# Altium PCB PCB2.PcbDoc
Units mil, origin at the board's own origin, x right, y up, seen from the top; angles counter-clockwise.
Board outline 2338.58 x 1574.8 mil, 4 copper layers (Top Routing, GND Plane, Power, Bottom Routing), stack 30.634 mil thick; 68 components, 41 nets, 245 pads, 40 vias.
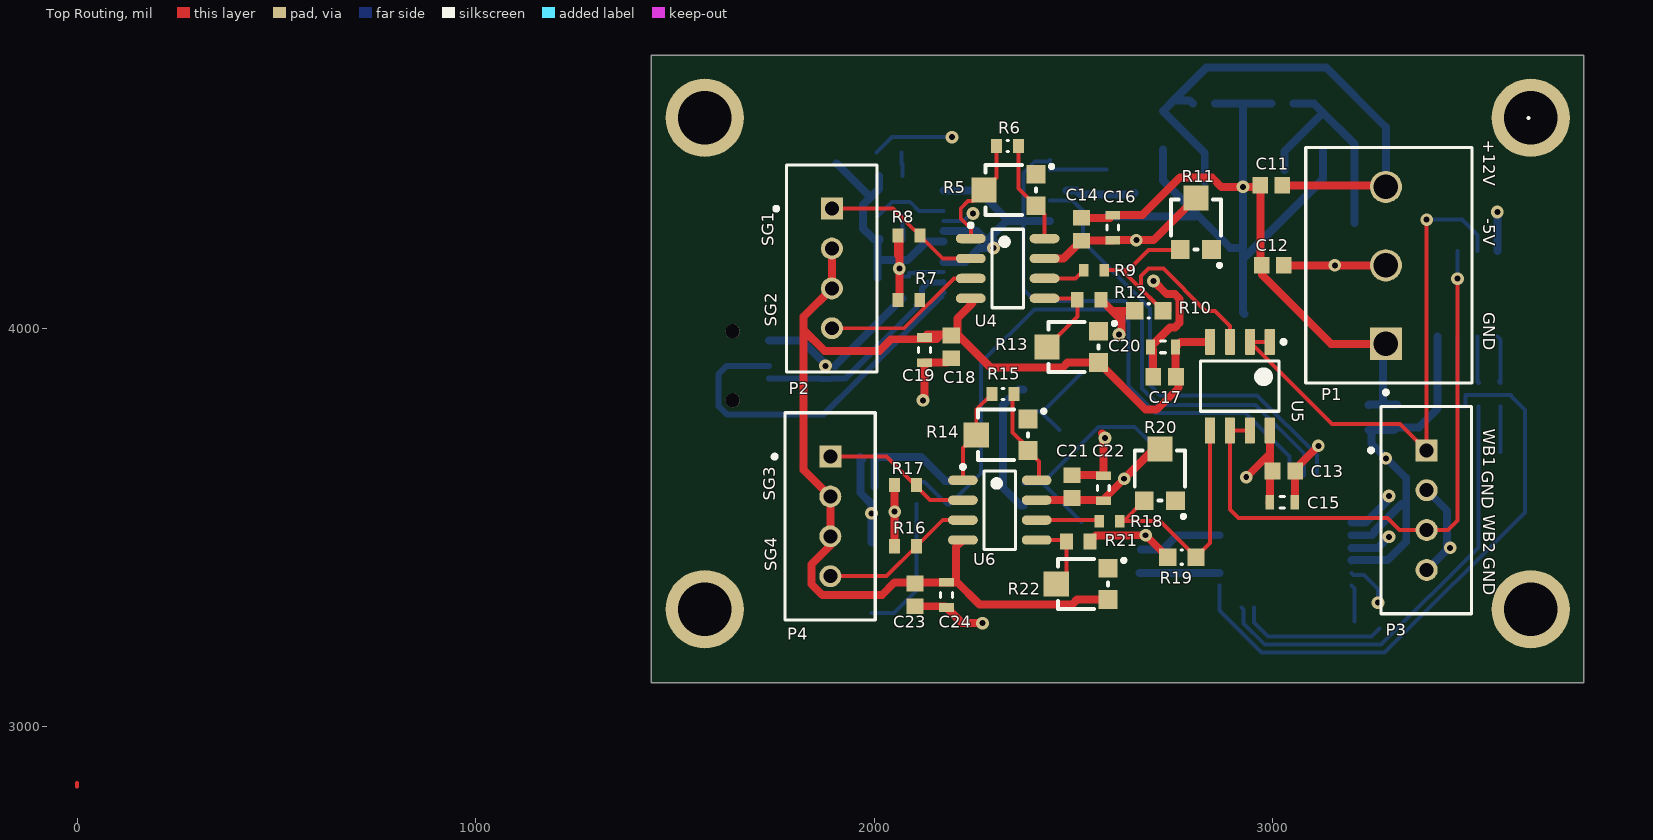
[diagram p0: Top Routing view]
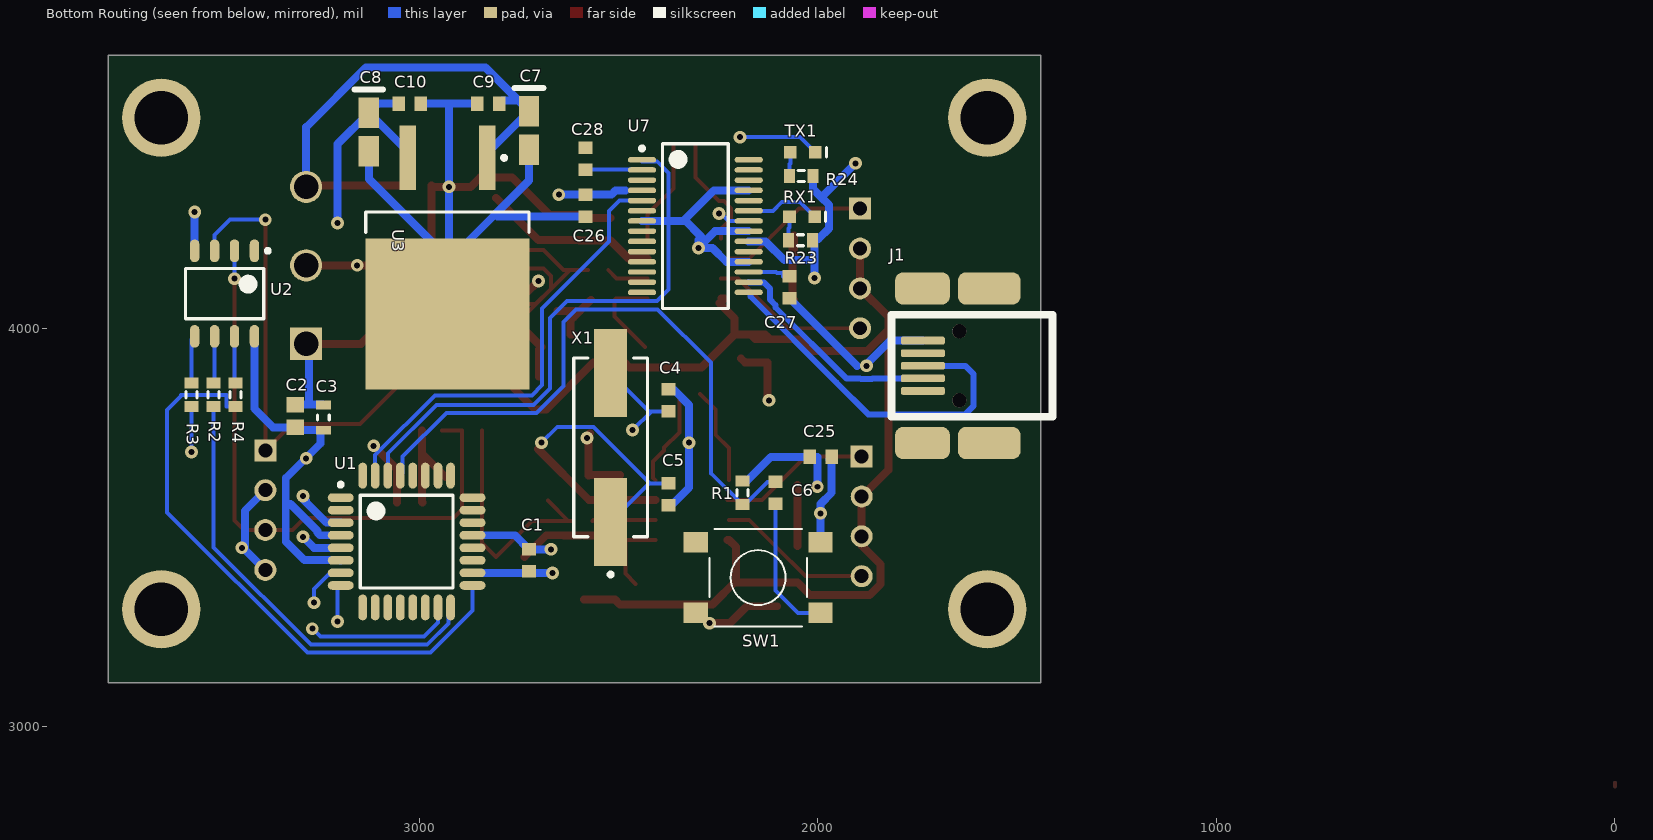
[diagram p1: Bottom Routing view, seen from below]
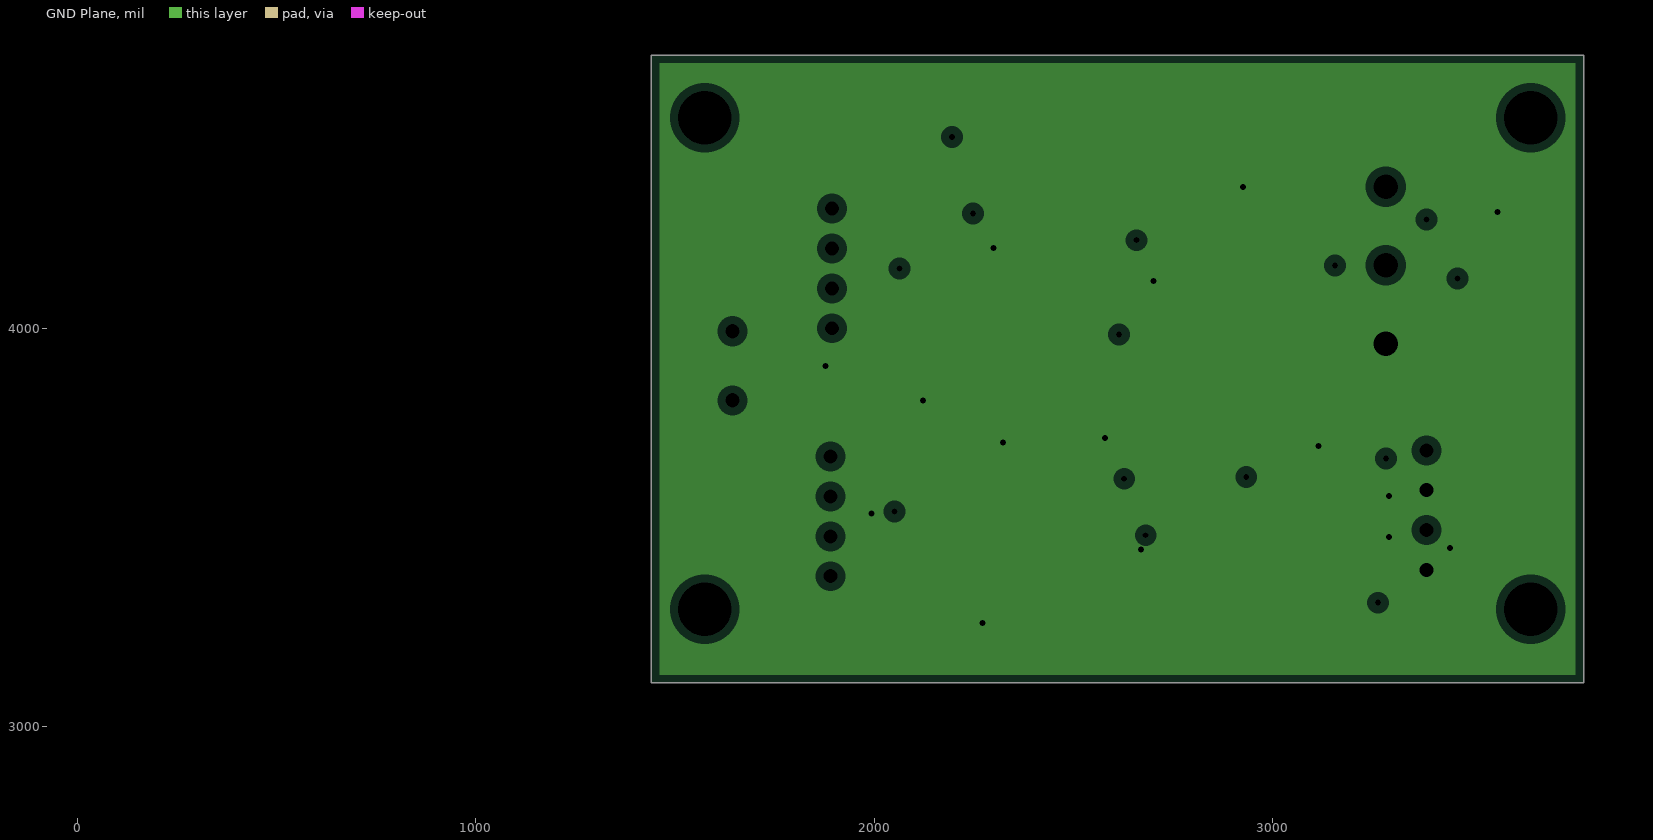
[diagram p2: GND Plane, clearances drawn from the general rule]
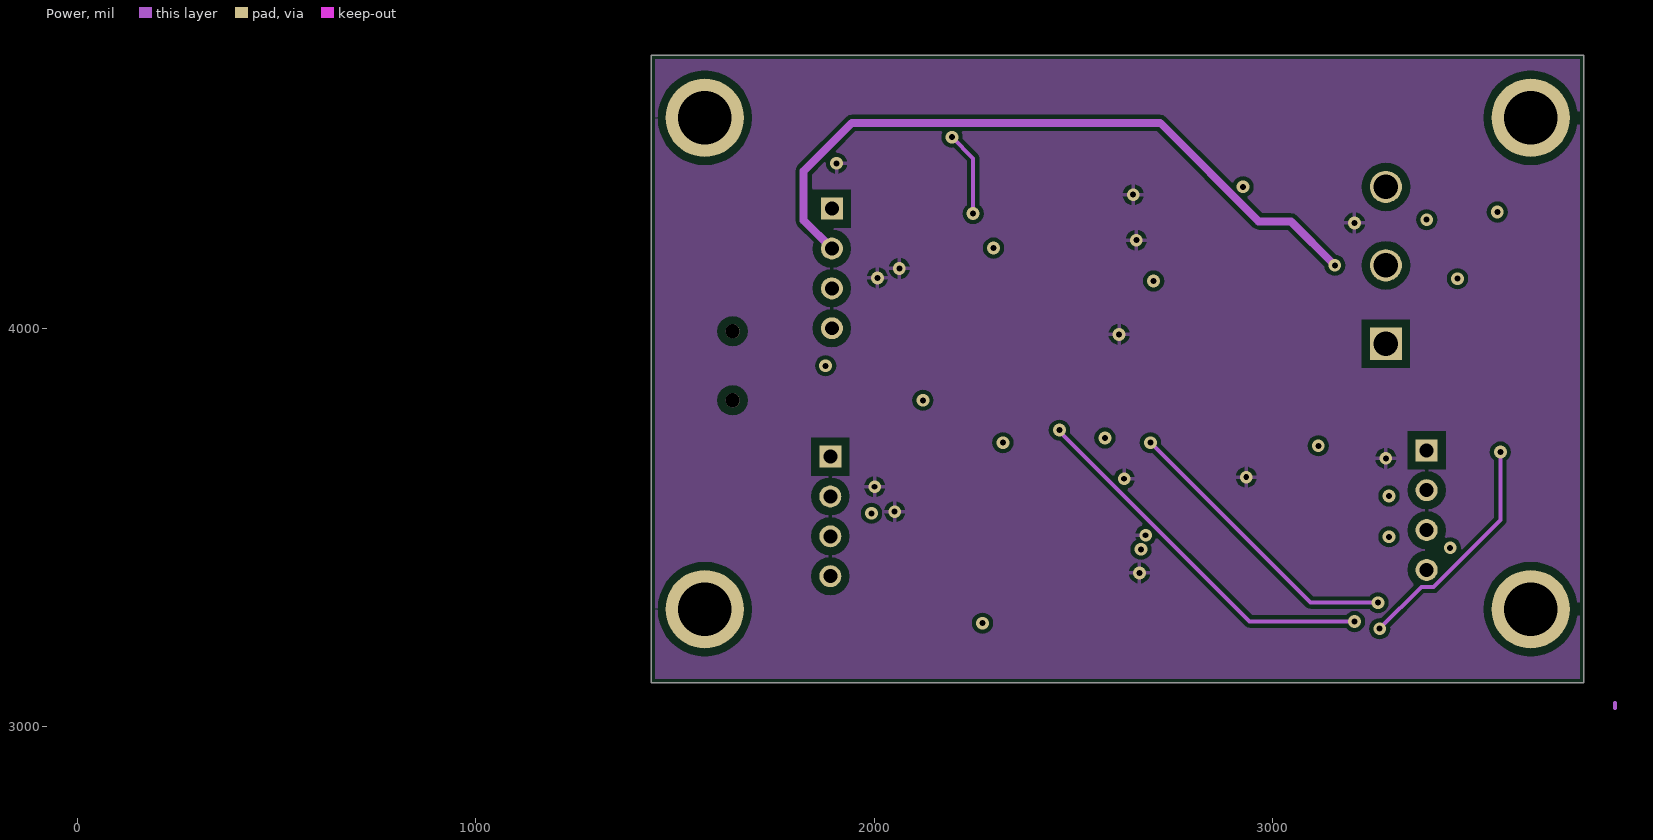
[diagram p3: Power]

## Layer stack, top to bottom
Top Solder: solder mask 0.4, Solder Resist, Dk 3.5
Top Routing: signal copper 1.4
Dielectric 1: core 10, FR-4, Dk 4.2
GND Plane: plane copper 1.417, net GND
Dielectric 3: prepreg 5, Dk 4.2
Power: signal copper 1.417
Dielectric 2: core 10, Dk 4.2
Bottom Routing: signal copper 1.4
Bottom Solder: solder mask 0.4, Solder Resist, Dk 3.5

## Board outline
3779.53,4685.04 1440.94,4685.04 1440.94,3110.24 3779.53,3110.24

## Design rules (kind name [scope] priority, off if disabled: settings)
BoardOutlineClearance [All] p1: gap=10 except(0: Arc-SplitContinuation Track-SplitContinuation SMDPad-SplitContinuation THPad-SplitContinuation Via-SplitContinuation Fill-SplitContinuation Poly-SplitContinuation Region-SplitContinuation Text-SplitContinuation)
Clearance [All] p1: gap=10 except(20: THPad-Poly)
DiffPairsRouting [All] p1: maxlimit=10 minlimit=10 mostfreqgap=10 toplayer_minwidth=15 toplayer_maxwidth=15 toplayer_prefwidth=15 midlayer1_minwidth=15 midlayer1_maxwidth=15 midlayer1_prefwidth=15 bottomlayer_minwidth=15 bottomlayer_maxwidth=15 bottomlayer_prefwidth=15 maxuncoupledlength=500
PlaneClearance [All] p1: clearance=20
PlaneConnect [All] p1: planeconnectstyle=Relief reliefexpansion=20 reliefentries=4 reliefconductorwidth=10 reliefairgap=10
PolygonConnect [All] p1: connectstyle=Relief reliefconductorwidth=10 reliefentries=4 polygonreliefangle="90 Angle" airgapwidth=10
RoutingVias [All] p1: holewidth=15 width=32 viastyle="Through Hole" minholewidth=15 minwidth=32 maxholewidth=15 maxwidth=32
SolderMaskExpansion [All] p1: expansion=4
Width Width_+12V [InNet('+12V')] p1: maxlimit=20 minlimit=20 preferedwidth=20
Width Width_GND [InNet('GND')] p2: maxlimit=20 minlimit=20 preferedwidth=20
Width Width_+5V [InNet('+5V')] p3: maxlimit=20 minlimit=12 preferedwidth=20
Width Width_-5V [InNet('-5V')] p4: maxlimit=20 minlimit=12 preferedwidth=20
Width [All] p5: maxlimit=10 minlimit=10 preferedwidth=10
27 further rules are at their usual default settings.

## Classes and differential pairs
component class Sheet1: C1 C2 C3 C4 C5 C6 C7 C8 C9 C10 R1 R2 R3 R4 SW1 U1 U2 U3 X1
component class F: C25 C26 C27 C28 J1 R23 R24 RX1 TX1 U7
component class WB: C11 C12 C13 C14 C15 C16 C17 C18 C19 C20 C21 C22 C23 C24 P1 P2 P3 P4 R5 R6 R7 R8 R9 R10 R11 R12 R13 R14 R15 R16 R17 R18 R19 R20 R21 R22 U4 U5 U6
differential pair USB: +USB_P -USB_N

## Components (designator, comment, footprint, x,y, rotation, side; value= is the part's Value field where it differs from the comment)
C1 "Cap Semi" 1608[0603] 2724.41,3417.32 r90 bottom
C2 "0.01uF" CAPC1608X87X35ML15T15 3311.02,3779.53 r270 bottom
C3 "1u" CAPC1608X90X20NL10 3240.16,3775.59 r270 bottom
C4 "Cap Semi" 1608[0603] 2374.02,3818.9 r270 bottom
C5 "Cap Semi" 1608[0603] 2374.02,3582.68 r90 bottom
C6 "Cap Semi" 1608[0603] 2106.3,3586.61 r270 bottom
C7 "TAJA475K016RNJ" AVX-TAJ-A-2_N 2724.41,4496.06 r270 bottom
C8 "TAJA475K016RNJ" AVX-TAJ-A-2_N 3125.98,4492.13 r270 bottom
C9 "Cap Semi" 1608[0603] 2826.77,4562.99 r0 bottom
C10 "Cap Semi" 1608[0603] 3023.62,4562.99 r180 bottom
C11 "10u" CAPC1608X90X38ML10T18 2996.06,4358.27 r180 top
C12 "10u" CAPC1608X90X38ML10T18 3000,4157.48 r180 top
C13 "0.01uF" CAPC1608X87X35ML15T15 3027.56,3641.73 r180 top
C14 "0.01uF" CAPC1608X87X35ML15T15 2519.68,4248.03 r270 top
C15 "1u" CAPC1608X90X20NL10 3023.62,3562.99 r180 top
C16 "1u" CAPC1608X90X20NL10 2598.43,4251.97 r270 top
C17 "0.01uF" CAPC1608X87X35ML15T15 2728.35,3877.95 r0 top
C18 "0.01uF" CAPC1608X87X35ML15T15 2192.91,3952.76 r90 top
C19 "1u" CAPC1608X90X20NL10 2125.98,3944.88 r90 top
C20 "1u" CAPC1608X90X20NL10 2724.41,3952.76 r0 top
C21 "0.01uF" CAPC1608X87X35ML15T15 2496.06,3602.36 r270 top
C22 "1u" CAPC1608X90X20NL10 2574.8,3598.43 r270 top
C23 "0.01uF" CAPC1608X87X35ML15T15 2102.36,3330.71 r90 top
C24 "1u" CAPC1608X90X20NL10 2181.1,3330.71 r90 top
C25 "Cap Semi" 1608[0603] 1992.13,3677.17 r0 bottom
C26 "Cap Semi" 1608[0603] 2582.68,4307.09 r90 bottom
C27 "Cap Semi" 1608[0603] 2070.87,4102.36 r90 bottom
C28 "Cap Semi" 1608[0603] 2582.68,4425.2 r90 bottom
J1 "67503-1020" MOLX-67503-1020_V 1736.22,3842.52 r0 bottom
P1 "3CON" SCREW-5.0-3WAYS_V 3283.46,4157.48 r90 top
P2 "SG" TECO-5-103414-2_V 1893.7,4149.61 r270 top
P3 "SG" TECO-5-103414-2_V 3385.83,3543.31 r270 top
P4 "SG" TECO-5-103414-2_V 1889.76,3527.56 r270 top
R1 "Res3" J1-0603 2188.98,3586.61 r90 bottom
R2 "Res3" J1-0603 3515.75,3832.68 r270 bottom
R3 "Res3" J1-0603 3570.87,3832.68 r270 bottom
R4 "Res3" J1-0603 3460.63,3832.68 r270 bottom
R5 "500" Trimpot_Cut_tape_3.4x3.4x2 2405.51,4385.83 r270 top
R6 "510" RESC0603(1608)_L 2334.65,4456.69 r180 top
R7 "120" RESC1608X55X25NL10T15 2086.61,4070.87 r180 top
R8 "120" RESC1608X55X25NL10T15 2086.61,4232.28 r180 top
R9 "10k" RESC1608X55X25LL10T15 2551.18,4145.67 r0 top
R10 "200K" RESC0603(1608)_M 2688.98,4043.31 r0 top
R11 "20k" Trimpot_Cut_tape_3.4x3.4x2 2846.46,4196.85 r180 top
R12 "1k" RESC1608X55X25ML10T15 2539.37,4070.87 r0 top
R13 "20k" Trimpot_Cut_tape_3.4x3.4x2 2562.99,3992.13 r270 top
R14 "500" Trimpot_Cut_tape_3.4x3.4x2 2385.83,3771.65 r270 top
R15 "510" RESC0603(1608)_L 2322.83,3834.65 r180 top
R16 "120" RESC1608X55X25NL10T15 2078.74,3452.76 r180 top
R17 "120" RESC1608X55X25NL10T15 2078.74,3606.3 r180 top
R18 "10k" RESC1608X55X25LL10T15 2590.55,3515.75 r0 top
R19 "200K" RESC0603(1608)_M 2771.65,3425.2 r0 top
R20 "20k" Trimpot_Cut_tape_3.4x3.4x2 2755.91,3566.93 r180 top
R21 "1k" RESC1608X55X25ML10T15 2511.81,3464.57 r0 top
R22 "20k" Trimpot_Cut_tape_3.4x3.4x2 2586.61,3397.64 r270 top
R23 "Res3" J1-0603 2043.31,4220.47 r0 bottom
R24 "Res3" J1-0603 2041.34,4381.89 r0 bottom
RX1 "150060RS75000" 0603_A 2039.37,4279.53 r0 bottom
SW1 "430152043826" 430152043826 2149.61,3374.02 r0 bottom
TX1 "150060RS75000" 0603_A 2037.4,4440.95 r0 bottom
U1 "ATmega88PA-AUR" 32A_N 3031.5,3464.57 r180 bottom
U2 "ADC_LTC1865" LTC1865_SOIC8 3488.19,4086.61 r270 bottom
U3 "L7805ABD2T-TR" TO-263_M 2929.13,4177.17 r270 bottom
U4 "LT1920" LT-S8-8_L 2334.65,4149.61 r0 top
U5 "NE5532ADR" D0008A_M 2917.32,3854.33 r270 top
U6 "LT1920" LT-S8-8_L 2314.96,3543.31 r0 top
U7 "FT232RL-Reel" SSOP-28_L 2307.09,4255.91 r180 bottom
X1 "ABLS2-16.000MHZ-D4Y-T" ABRA-ABLS2-2_V 2519.68,3700.79 r90 bottom

## Footprints (in the part's own frame and the unit in brackets; to place one, negate y for a bottom-side part, rotate by r counter-clockwise, add the part's x,y. Pads: shape width x height; smd on the part's side, far side on the other; paste and mask are expansions set on the pad)
32A_N [mm] "Thin QFP, 32-Leads, Body 7x7mm, Pitch 0.8mm, IPC Medium Density"
  oval 1.65x0.55 smd: 1(-4.2,2.8) 2(-4.2,2) 3(-4.2,1.2) 4(-4.2,0.4) 5(-4.2,-0.4) 6(-4.2,-1.2) 7(-4.2,-2) 8(-4.2,-2.8) 17(4.2,-2.8) 18(4.2,-2) 19(4.2,-1.2) 20(4.2,-0.4) 21(4.2,0.4) 22(4.2,1.2) 23(4.2,2) 24(4.2,2.8)
  oval 0.55x1.65 smd: 9(-2.8,-4.2) 10(-2,-4.2) 11(-1.2,-4.2) 12(-0.4,-4.2) 13(0.4,-4.2) 14(1.2,-4.2) 15(2,-4.2) 16(2.8,-4.2) 25(2.8,4.2) 26(2,4.2) 27(1.2,4.2) 28(0.4,4.2) 29(-0.4,4.2) 30(-1.2,4.2) 31(-2,4.2) 32(-2.8,4.2)
  silkscreen extent -4.33,-2.95 2.95,3.75, body extent -3.5,-3.5 3.5,3.5, height 1.2
0603_A [mm] "Chip LED, 2-Leads, Body 1.6x0.8mm, IPC Medium Density"
  rect 0.8x0.8 smd: 1(-0.8,0) 2(0.8,0)
  silkscreen extent -1.5,-0.3 -1.5,0.3, body extent -0.8,-0.4 0.8,0.4, height 0.7
1608[0603] [mm] "Chip Capacitor, Body 1.6x0.8mm, IPC High Density"
  rect 0.8x0.9 smd: 1(-0.7,0) 2(0.7,0)
  body extent -0.87,-0.48 0.87,0.48, height 1.3
430152043826 [mm] "6*6mm vertical type, SMD, height 4.3mm, white actuator, 260gf, T&R"
  rect 1.55x1.3 smd: 1(-3.975,2.25) 2(-3.975,-2.25) 3(3.975,2.25) 4(3.975,-2.25)
  silkscreen extent -3.1,-3.1 3.1,3.1, body extent -4.5,-3.1 4.5,3.1, height 4.29
ABRA-ABLS2-2_V [mm] "SMD, 2-Leads, Body 11.4x4.7mm, Height 3.3mm"
  rect 5.6x2.1 smd: 1(-4.75,0) 2(4.75,0)
  silkscreen extent -8.22,-2.35 5.7,2.35, body extent -5.7,-2.35 5.7,2.35, height 3.3
AVX-TAJ-A-2_N [mm] "Molded Capacitor, 2-Leads, Body 3.4x1.8mm, IPC Medium Density"
  rect 1.95x1.3 smd: 1(-1.225,0) 2(1.225,0)
  silkscreen extent -2.7,-0.9 -2.7,0.9, body extent -1.92,-0.9 1.92,0.9, height 1.8
CAPC1608X87X35ML15T15 [mm] "Chip Capacitor, 2-Leads, Body 1.75x0.95mm, IPC Low Density"
  rect 1x1.1 smd: 1(-0.725,0) 2(0.725,0)
  body extent -0.87,-0.48 0.87,0.47, height 0.87
CAPC1608X90X20NL10 [mm] "Chip Capacitor, 2-Leads, Body 1.70x0.90mm, IPC Medium Density"
  rect 0.55x0.95 smd: 1(-0.8,0) 2(0.8,0)
  silkscreen extent -0.15,-0.38 0.15,0.37, body extent -0.85,-0.45 0.85,0.45, height 0.9
CAPC1608X90X38ML10T18 [mm] "Chip Capacitor, 2-Leads, Body 1.7x0.9mm, IPC Low Density"
  rect 1x1.05 smd: 1(-0.7,0) 2(0.7,0)
  body extent -0.85,-0.45 0.85,0.45, height 0.9
D0008A_M [mm] "SOIC, 8-Leads, Body 5x4mm, Pitch 1.27mm, IPC Low Density"
  rrect15% 1.65x0.65 smd: 1(-2.825,1.905) 2(-2.825,0.635) 3(-2.825,-0.635) 4(-2.825,-1.905) 5(2.825,-1.905) 6(2.825,-0.635) 7(2.825,0.635) 8(2.825,1.905)
  silkscreen extent -2.95,-2.5 1.6,2.91, body extent -3,-2.45 3,2.45, height 1.63
J1-0603 [mm] "Chip Resistor, Body 1.6x0.8mm, IPC High Density"
  rect 0.7x0.9 smd: 1(-0.75,0) 2(0.75,0)
  silkscreen extent -0.2,-0.35 0.2,0.35, body extent -0.85,-0.48 0.85,0.48, height 0.9
LT-S8-8_L [mm] "SOIC, 8-Leads, Body 4.9x3.9mm, Pitch 1.27mm, IPC High Density"
  oval 1.9x0.6 smd: 1(-2.35,1.905) 2(-2.35,0.635) 3(-2.35,-0.635) 4(-2.35,-1.905) 5(2.35,-1.905) 6(2.35,-0.635) 7(2.35,0.635) 8(2.35,1.905)
  silkscreen extent -2.47,-2.5 1,2.88, body extent -2,-2.5 2,2.5, height 1.76
LTC1865_SOIC8 [mm] "SOIC, 8-Leads, Body 4.90x3.90mm, Pitch 1.27mm, IPC Medium Density"
  oval 1.45x0.6 smd: 1(-2.725,1.905) 2(-2.725,0.635) 3(-2.725,-0.635) 4(-2.725,-1.905) 5(2.725,-1.905) 6(2.725,-0.635) 7(2.725,0.635) 8(2.725,1.905)
  silkscreen extent -2.85,-2.5 1.6,2.88, body extent -2,-2.5 2,2.5, height 1.76
MOLX-67503-1020_V [mm] "Mini USB Connector, SMT, Righer Angle"
  rrect50% 2.8x0.5 smd: 1(0,0) 2(0,-0.8) 3(0,-1.6) 4(0,-2.4) 5(0,-3.2)
  rrect50% 3.5x2.05 smd: 6(0.025,3.325) 8(0.025,-6.525)
  rrect50% 4x2.05 smd: 7(-4.225,3.325) 9(-4.225,-6.525)
  round 0.9 hole 0.9 unplated: X(-2.325,-3.8) Y(-2.325,0.6)
  silkscreen extent -8.25,-4.85 2,1.65, body extent -8.22,-6.56 0.78,3.34, height 3.95
RESC0603(1608)_L [mm] "Chip Resistor, Body 1.6x0.8mm, IPC High Density"
  rect 0.7x0.9 smd: 1(-0.7,0) 2(0.7,0)
  silkscreen extent -0.05,-0.35 0.05,0.35, body extent -0.85,-0.47 0.85,0.47, height 0.6
RESC0603(1608)_M [mm] "Chip Resistor, Body 1.6x0.8mm, IPC Low Density"
  rect 1.1x1.1 smd: 1(-0.9,0) 2(0.9,0)
  silkscreen extent -0.05,-0.45 0.05,0.45, body extent -0.85,-0.47 0.85,0.47, height 0.6
RESC1608X55X25LL10T15 [mm] "Chip Resistor, 2-Leads, Body 1.70x0.90mm, IPC High Density"
  rect 0.6x0.8 smd: 1(-0.65,0) 2(0.65,0)
  body extent -0.85,-0.45 0.85,0.45, height 0.55
RESC1608X55X25ML10T15 [mm] "Chip Resistor, 2-Leads, Body 1.70x0.90mm, IPC Low Density"
  rect 0.8x1 smd: 1(-0.75,0) 2(0.75,0)
  body extent -0.85,-0.45 0.85,0.45, height 0.55
RESC1608X55X25NL10T15 [mm] "Chip Resistor, 2-Leads, Body 1.70x0.90mm, IPC Medium Density"
  rect 0.7x0.9 smd: 1(-0.7,0) 2(0.7,0)
  body extent -0.85,-0.45 0.85,0.45, height 0.55
SCREW-5.0-3WAYS_V [mm] "Socket, Screw Terminal Block, 3-Leads, Pitch 5mm, 90 Degree Angle, Through-Hole"
  rect 2.05x2.05 hole 1.55: 1(-5,0)
  round 2.05 hole 1.55: 2(0,0) 3(5,0)
  silkscreen extent -8.22,-5.5 7.5,5.1, body extent -7.5,-5.5 7.5,5.1, height 18.2
SSOP-28_L [mm] "SOP, 28-Leads, Body 10.2x5.3mm, Pitch 0.65mm, IPC High Density"
  oval 1.8x0.35 smd: 1(-3.4,4.225) 2(-3.4,3.575) 3(-3.4,2.925) 4(-3.4,2.275) 5(-3.4,1.625) 6(-3.4,0.975) 7(-3.4,0.325) 8(-3.4,-0.325) 9(-3.4,-0.975) 10(-3.4,-1.625) 11(-3.4,-2.275) 12(-3.4,-2.925) 13(-3.4,-3.575) 14(-3.4,-4.225) 15(3.4,-4.225) 16(3.4,-3.575) 17(3.4,-2.925) 18(3.4,-2.275) 19(3.4,-1.625) 20(3.4,-0.975) 21(3.4,-0.325) 22(3.4,0.325) 23(3.4,0.975) 24(3.4,1.625) 25(3.4,2.275) 26(3.4,2.925) 27(3.4,3.575) 28(3.4,4.225)
  silkscreen extent -3.52,-5.25 2.1,5.25, body extent -2.8,-5.25 2.8,5.25, height 2
TECO-5-103414-2_V [mm] "Male Header, 4-Leads, Body 5.7658 x 13.208mm, Pitch 2.54mm"
  rect 1.4x1.4 hole 0.889: 1(-3.81,0)
  round 1.4 hole 0.889: 2(-1.27,0) 3(1.27,0) 4(3.81,0)
  silkscreen extent -6.6,-3.67 6.6,2.87, body extent -6.6,-2.89 6.6,2.87, height 13.94
TO-263_M [mm] "D2-PAK, 4-Leads, Body 9.2x10.2mm, Pitch 2.54mm, Lead Span 15.4mm, IPC Low Density"
  rect 4.1x1.05 smd: 1(-6.35,2.54) 3(-6.35,-2.54)
  rect 9.6x10.45 smd: 4(3.6,0)
  silkscreen extent -6.47,-5.2 -1.6,5.2, body extent -2.9,-5.2 6.45,5.2, height 4.6
Trimpot_Cut_tape_3.4x3.4x2 [mm]
  rect 1.2x1.2 smd: 1(0,0) 3(2,0)
  rect 1.6x1.6 smd: 2(1,-3.3)
  silkscreen extent -0.6,-3.2 2.6,1.1

## Part data
C1 C4 C5 C6 C9 C10 C25 C26 C27 C28: "Capacitor (Semiconductor SIM Model)"
C2 C13 C14 C17 C18 C21 C23: library part CMP-2000-05987-1, "Chip Capacitor, 10 nF, +/- 10%, 50 V, -55 to 125 degC, 0603 (1608 Metric), RoHS, Bulk"
C3 C15 C16 C19 C20 C22 C24: library part CMP-1663-00002-4, "Chip Capacitor, 1 uF, +/- 10%, 16 V, -55 to 125 degC, 0603 (1608 Metric), RoHS, Tape and Reel"
C7 C8: library part CMP-2100-03687-1, "Standard Tantalum, 4.7 uF, +/- 10%, 16 V, -55 to 125 degC, 2-Pin SMD (1206), RoHS, Tape and Reel"
C11 C12: library part CMP-1662-00008-2, "Chip Capacitor, 10 uF, +/- 20%, 4 V, -55 to 85 degC, 0603 (1608 Metric), RoHS, Tape and Reel"
J1: library part CMP-0411-00002-1, "USB, MINI, SMD, RA KME04-USBMU03A01"
P1: library part CMP-0617-00010-1, "Socket, Screw Terminal Block, 3 Way, 5.0 mm Pitch, 90 Degree Angle, Through-Hole"
P2 P3 P4: library part CMP-2000-05625-1, "Male Header, Pitch 2.54 mm, 1 x 4 Position, Height 14.199 mm, Tail Length 3.302 mm, -55 to 105 degC, RoHS, Rail/Tube"
R1 R2 R3 R4 R23 R24: "Resistor"
R5 R11 R13 R14 R20 R22: library part Component_1
R6 R15: library part CMP-1012-00067-1, "510R 0.1W 5% 0603 (1608 Metric)  SMD"
R7 R8 R16 R17: library part CMP-1659-00034-1, "Chip Resistor, 120 Ohm, +/- 1%, 100 mW, -55 to 155 degC, 0603 (1608 Metric), RoHS, Tape and Reel"
R9 R18: library part CMP-1659-00054-1, "Chip Resistor, 10 KOhm, +/- 1%, 0.1 W, -55 to 155 degC, 0603 (1608 Metric), RoHS, Tape and Reel"
R10 R19: library part CMP-1012-00129-1, "200K 0.1W 5% 0603 (1608 Metric)  SMD"
R12 R21: library part CMP-1659-00009-3, "Chip Resistor, 1 KOhm, +/-1%, 0.1 W, -55 to 155 degC, 0603 (1608 Metric), RoHS, Tape and Reel"
RX1 TX1: library part CMP-1426-00001-1, "SMD mono-color Chip LED, WL-SMCW, Red"
SW1: library part CMP-1452-00001-1, "WS-TASV SMD Tact Switch 6X6 mm"
U1: library part CMP-0095-00212-2, "8-bit AVR Microcontroller, 8KB Flash, 512 Bytes EEPROM, 1KB SRAM, 32-pin TQFP, Industrial Grade (-40°C to 85°C), Reel"
U3: library part CMP-0244-00199-1, "Positive Voltage Regulator, 3-Pin D2PAK, Tape and Reel"
U4 U6: library part CMP-0359-03370-2, "Single Channel, Resistor Gain Programmable, Precision Instrumentation Operational Amplifier, 0.8 MHz Typical GBW, 1.2 V/us Typical SR, 4.6 to 40 V, 8-Pin SOIC (S8-8), Commercial, Pb-Free"
U5: library part CMP-0017-00450-2, "Dual Low-Noise Operational Amplifier, 10 to 30 V, 0 to 70 degC, 8-pin SOIC (D8), Green (RoHS & no Sb/Br)"
U7: library part CMP-0078-00029-3, "USB UART Asynchronous Serial Data Transfer Chip, 28-pin SSOP, Tape and Reel"
X1: library part CMP-0277-00002-1, "Low Profile Surface Mount Microprocessor Crystal, 16.000 MHz +/-30 ppm, 180 Ohm, -40 to 85 degC, 2-Pin 11.4 x 4.7 x 3.3 mm SMD, RoHS, Tape and Reel"

## Free pads (board coordinates)
  round 196.85 hole 133.86: 0(1574.8,3294.82) 0(1574.8,4527.56) 0(3646.86,3294.82) 0(3646.86,4527.56)

## Via types
v1: diameter 32, hole 15, Top Routing to Bottom Routing, 20 vias
v2: diameter 32, hole 15, Power to Bottom Routing, 11 vias
v3: diameter 32, hole 15, Top Routing to Power, 7 vias
v4: diameter 32, hole 15, GND Plane to Bottom Routing, 2 vias

## Nets (pads, with @x,y where several pads share a name; then routed paths per layer and width w, separated by ;. In a path a pad name is that pad's centre, name@x,y a point inside that pad or via, vN(x,y) a via of type N, cw(c..) or ccw(c..) an arc to the next point about the centre after c; other vN are vias at no path point)
+5V: C1.1 C2.2 C3.2 C8.1 C10.1 C13.2 C14.2 C15.2 C16.2 C21.2 C22.2 C25.2 C26.2 R1.2 R7.2 R8.2 R10.1 R11.2 R12.2 R16.2 R17.2 R19.1 R20.2 R21.2 R23.1 R24.1 U1.4 U1.6 U1.18 U2.8 U3.3 U4.7 U5.8 U6.7 U7.4 U7.20 | length 4695.1
  Top Routing w20: R16.2 2051.18,3602 R17.2 ; R7.2 2062.99,4070.87 R8.2@2062.99,4228.35 ; 2059.06,4183 R8.2 ; U6.7 2573.42,3568.31 R20.2@2701.97,3696.85 ; U4.7 2474.8,4174.61 C14.2 2597.44,4219.49 C16.2 2700.79,4220.47 R11.2 ; R21.2 2556.77,3480 2585.06,3480 2585.37,3480.32 2595.73,3480.32 2596.05,3480 2636.24,3480 2636.55,3480.32 v3(2681.1,3480.32) R19.1 ; R12.2 2596.46,4043.31 ; v3(2614.17,3984.24) v3@2620.07,3984.24 ; v3@2620.08,3984.25 2620.08,4033.46 2613.19,4026.57 2596.46,4043.31 ; R10.1 2596.46,4043.31 ; v3(2933.27,3625.98) 2992.32,3685.04 ; C15.2 2992.32,3563.19 2992.32,3685.04 ; U5.8 2992.32,3685.04
  Bottom Routing w20: v2(1905.51,4413.39) 1989.8,4329.09 1991.91,4329.09 ; v2(2001,3602) 2001,3677.17 C25.2 2116.98,3677.17 2178,3616.14 R1.2 ; v2(2007.87,4125.98) 2007.87,4170.28 ; R24.1 2011.81,4349 1991.91,4329.09 ; U7.20 2130.91,4217.52 2083.66,4170.28 2007.87,4170.28 ; 2481.93,4345.47 2482.52,4344.88 2507.47,4344.88 2517.71,4334.64 C26.2 v2(2649.6,4334.64) v2@2653.54,4338.58 ; v2(2665.36,3385.83) U1.18 ; U3.3@3029.13,4396.17 U3.3 3029.13,4443.5 C8.1 ; C10.1 3103.35,4562.99 C8.1 ; U1.6 3197.52,3417.99 3288.07,3417.99 3334.64,3464.56 3334.64,3623.36 3248,3710 C3.2@3248,3744.1 ; U1.4 3249,3480.32 3255.34,3486.65 3255.34,3491.29 3322.62,3558.57 3327.26,3558.57 ; v2(3204.72,4263.78) 3204.72,4461.61 C8.1 ; C3.2 C3.2@3248,3744.1 ; U2.8 3413.19,3797.81 3366.36,3750.99 C2.2 3304.13,3744.1 C3.2@3248,3744.1 ; 1991.91,4329.09 1972,4309.19 1972,4250 1998,4224 2013.78,4224 R23.1 2007.87,4214.57 2007.87,4170.28
  other v1: 3283.46,3673.23
  other v3: 2051.18,3539.37 2627.16,3622.05 2062.99,4149.61 2657.48,4220.47
+12V: C7.1 C9.1 C11.1 P1.3 U3.1 | length 1349.5
  Top Routing w20: C11.1 3023.62,4358 3279.79,4358 P1.3
  Bottom Routing w20: C9.1 2791.34,4570.87 2750.98,4570.87 ; U3.1@2829.13,4367.17 U3.1 2829.13,4439.57 C7.1 2750.98,4570.87 ; P1.3 3283.46,4503.94 3133.86,4653.54 2833.66,4653.54 2750.98,4570.87
-5V: C12.1 C17.2 C18.2 C19.2 C20.2 C23.2 C24.2 P1.2 P2.2 P2.3 P4.2 P4.3 R13.3 R22.3 U4.4 U5.4 U6.4 | length 5300.8
  Top Routing w20: 1822.83,3995.17 1875,3943 2013,3943 2042,3972 2156,3972 2168.25,3984.25 ; 1822.83,4027.56 1822.83,3644.49 P4.2 P4.3 1889.76,3454.57 1842.2,3407.01 1842.2,3357.86 1870.06,3330 2018.9,3330 2051.1,3362.2 C24.2 2200.79,3362.2 2204.72,3366.14 ; 1822.83,4028.74 P2.3 P2.2 ; C19.2@2121.06,3972.44 2129.92,3981.3 2132.88,3984.25 C18.2@2208.66,3984.25 ; U6.4@2226.38,3468.31 U6.4 2204.72,3450.59 2204.72,3366.14 ; U4.4 2234.25,4074.61 2246.43,4062.43 2208.66,4024.66 C18.2@2208.66,3984.25 ; R22.3 2508.6,3318.9 2496.47,3306.77 2264.09,3306.77 2204.72,3366.14 ; U5.4 2768.7,3965.55 C20.2 2755.91,3878.94 C17.2 2763.78,3871.06 2763.78,3850.39 2708.66,3795.28 2681.1,3795.28 R13.3 2484.98,3913.39 2472.85,3901.26 2291.65,3901.26 C18.2@2208.66,3984.25 ; C12.1 v1(3155.51,4157.48) P1.2
  Power w20: P2.2 1822.83,4270.47 1822.83,4393.7 1944.13,4515 2717.28,4515 2964.57,4267.72 3045.27,4267.72 v1(3155.51,4157.48)
DTR: C28.1 U7.2 | length 142.1
  Bottom Routing w10: U7.2 2441.93,4397.64 C28.1
ENC_SCK: R4.1 U2.7 | length 118.2
  Bottom Routing w10: R4.1 3463.19,3864.76 U2.7
ENC_SDI: R3.1 U2.5 | length 125.6
  Bottom Routing w10: U2.5 3570.87,3971.65 R3.1 R3.1@3567.13,3865.95
ENC_SDO: R2.1 U2.6 | length 120.1
  Bottom Routing w10: U2.6 3513.19,3864.77 R2.1 R2.1@3517.13,3863.58
FTDI_RST: C28.2
FTDI_RX: U1.31 U7.5 | length 1142.6
  Bottom Routing w10: U7.5 2497.12,4319.88 2523.62,4293.38 2523.62,4217.42 2691.76,4049.29 2691.76,3856.91 2717.21,3831.46 2960.54,3831.46 3110.24,3681.76 U1.31
FTDI_TX: U1.30 U7.1 | length 1408.8
  Bottom Routing w10: U7.1 2440.95,4418.54 2403.34,4418.54 2374.02,4389.22 2374.02,4097 2403.34,4067.68 2629.17,4067.68 2671.76,4025.09 2671.76,3848.63 2713.3,3807.09 2956.63,3807.09 3078.74,3684.98 U1.30
GND: C1.2 C2.1 C3.1 C4.1 C5.1 C7.2 C8.2 C9.2 C10.2 C11.2 C12.2 C13.1 C14.1 C15.1 C16.1 C17.1 C18.1 C19.1 C20.1 C21.1 C22.1 C23.1 C24.1 C25.1 C26.1 C27.1 J1.5 P1.1 P3.2 P3.4 SW1.2 U1.3 U1.5 U1.21 U2.4 U3.4 U7.7 U7.18 U7.21 U7.25 | length 6411.5
  Top Routing w20: C23.1 2178.15,3302.17 C24.1 2220.47,3259.84 v1(2271.65,3259.84) ; v1(2122.05,3818.9) 2125.99,3822.84 C19.1 2182.09,3913.39 C18.1 ; C21.1 C22.1@2573.82,3630.91 ; C14.1 2591.54,4276.57 C16.1 2672.5,4283.46 2767.31,4378.27 2846.87,4378.27 2870.8,4354.33 v1(2925.2,4354.33) 2964.57,4354.33 C11.2 2968.5,4161.42 C12.2 2972.44,4133.86 3145.67,3960.63 P1.1 ; v1@2570.87,3736.22 2574.8,3732.28 C22.1 ; C17.1 2699.8,3945.87 C20.1 2741.81,4001.65 2754.35,4001.65 2766.06,4013.37 2766.06,4073.24 2754.35,4084.96 2733.92,4084.96 v1(2700.78,4118.1) ; C15.1 3055.12,3640.75 C13.1 3056.1,3646.65 v1(3114.17,3704.72)
  Bottom Routing w20: J1.5 1818.9,3968.5 1877.95,3909.45 v1(1877.95,3905.5) ; 1901.57,3905.5 C27.1 ; C25.1 1971,3670.73 1965,3670.73 1965,3587.09 1993.11,3558.98 SW1.2 ; U7.18 2229.33,4166.34 2263.77,4200.78 v1(2299.21,4200.78) ; U7.21 2257.87,4243.11 2299.21,4201.78 v1(2299.21,4200.78) ; U7.25 2260.83,4345.47 2334.65,4271.65 ; C5.1 2367.39,3555.12 2322.83,3599.67 2322.83,3807.09 2362.21,3846.46 C4.1 ; U7.7 2337.6,4268.7 2334.65,4271.65 ; C26.1 2803.15,4279.53 ; v4(2669.29,3444.88) C1.2 2759.84,3480.32 U1.21 ; C7.2 2724.41,4370.08 2893.05,4201.44 U3.4@2925.2,4201.44 ; C9.2 2925.2,4562.99 ; U3.4 2925.2,4039.37 U3.4@2925.2,4173.23 ; C10.2 2925.2,4562.99 ; C8.2 3125.98,4374.02 U3.4@2925.2,4173.23 ; U1.5 3263.78,3448.82 v1(3291.34,3476.38) ; U1.3 3232.28,3511.81 3291.33,3570.86 v1(3291.33,3578.73) 3291.33,3574.8 v1@3283.46,3566.93 ; C3.1 3241.14,3808.07 3276.08,3808.07 ; P1.1@3276.08,3953.25 3276.08,3808.07 ; C2.1 3276.08,3808.07 ; P3.4 3437.4,3444.88 3437.4,3541.73 P3.2 ; U2.4 v1(3563.19,4291.14) ; v1(2299.21,4200.78) 2299.21,4220.48 2291.34,4228.35 2334.65,4271.65 ; U3.4@2925.2,4173.23 U3.4@2925.2,4201.44 ; U3.4@2925.2,4201.44 2925.2,4562.99
  other v1: 3444.88,3448.82 1993.11,3535.43 2578.74,3724.41
  other v4: 2322.83,3712.6
MCU_RST: C6.1 R1.1 U1.29 | length 1622.1
  Bottom Routing w10: C6.1 2125.91,3614.17 2183,3557.09 R1.1 2267.72,3635.82 2267.72,3913.39 2401.57,4047.24 2606.3,4047.24 2637.8,4015.75 2637.8,3854.31 2705.01,3787.09 2931.89,3787.09 3041.57,3677.4 3041.57,3635.59 U1.29
MISO: R2.2 U1.16 | length 1107.9
  Bottom Routing w10: U1.16 2926.93,3293.54 2926.93,3258.79 2979.72,3206 3271.84,3206 3515.75,3449.91 R2.2 R2.2@3515.94,3803.15
MOSI: R3.2 U1.15 | length 1076.7
  Power w10: v2(3268,3246) 3372.75,3350.75 3403.45,3350.75 3570.87,3518.16 v2(3570.87,3688.97)
  Bottom Routing w10: U1.15 2952.76,3261.24 2988,3226 3248,3226 v2(3268,3246) ; v2(3570.87,3688.97) R3.2
NetC4_2: C4.2 U1.8 X1.2 | length 1287.3
  Power w10: v2(2464.57,3744.09) 2464.57,3740.8 2941.59,3263.78 v2(3204.72,3263.78)
  Bottom Routing w10: C4.2 2417.32,3791.34 ; v2(2464.57,3744.09) 2417.32,3791.34 ; X1.2 2423.23,3791.34 2417.32,3791.34 ; U1.8 3204.72,3346.46 v2(3204.72,3263.78)
NetC5_2: C5.2 U1.7 X1.1 | length 1434.9
  Power w10: v2(2692.91,3712.6) 3094.49,3311.02 v1(3263.78,3311.02)
  Bottom Routing w10: X1.1 2423.23,3610.24 C5.2 2421.26,3610.24 2562.99,3751.97 2653.54,3751.97 v2(2692.91,3712.6) ; U1.7 3202.52,3380.16 3229.2,3380.16 3263.78,3345.58 v1(3263.78,3311.02)
NetC6_2: C6.2 SW1.1 | length 353.8
  Bottom Routing w10: SW1.1 2050,3285.43 2106.3,3341.73 C6.2
NetC27_2: C27.2 U7.17 | length 111.4
  Bottom Routing w10: C27.2 2087.5,4129.92 2087.5,4137.66 2102.25,4137.66 2105.34,4140.75 U7.17
NetP2_1: P2.1 R8.1 U4.2 | length 392.3
  Top Routing w10: P2.1 2046.85,4299.61 R8.1 2171.85,4174.61 U4.2@2234.25,4174.61
NetP2_4: P2.4 R7.1 U4.3 | length 400.2
  Top Routing w10: P2.4 2075,3999.61 2200,4124.61 U4.3
NetP4_1: P4.1 R17.1 U6.2 | length 381.9
  Top Routing w10: P4.1 2031.1,3677.56 2140.35,3568.31 U6.2 U6.2@2226.38,3568.31
NetP4_4: P4.4 R16.1 U6.3 | length 391
  Top Routing w10: P4.4 2031.1,3377.56 R16.1 2171.85,3518.31 U6.3
NetR5_2: R5.2 R6.2 U4.1 | length 287
  Top Routing w10: U4.1 2242.13,4249.45 2217.03,4274.55 2217.03,4300.23 2235.19,4318.39 2247.53,4318.39 R5.2 2307.09,4377.95 R6.2
NetR5_3: R5.3 R6.1 U4.8 | length 259
  Top Routing w10: R6.1 2362.21,4350.39 R5.3 2427.17,4285.43 U4.8
NetR9_1: R9.1 U4.6 | length 107.2
  Top Routing w10: U4.6 2504.53,4124.61 R9.1
NetR9_2: R9.2 R10.2 R11.3 U5.3 | length 840.4
  Top Routing w10: R9.2 2622.05,4145.67 ; R11.3 2767.72,4195.47 2687.6,4195.47 2637.8,4145.67 2622.05,4145.67 ; U5.3 2892.32,4005.32 2854.33,4043.31 2831.36,4043.31 2725.56,4149.1 2687.94,4149.1 2669.78,4130.94 2669.78,4097.93 2707.76,4059.96 2741.06,4059.96 2741.06,4043.31 R10.2 2622.05,4145.67
NetR12_1: R12.1 R13.2 U4.5 | length 234.1
  Top Routing w10: U4.5 2506.1,4074.61 R12.1 2509.84,4029.53 R13.2
NetR14_2: R14.2 R15.2 U6.1 | length 246.5
  Top Routing w10: U6.1 2222.44,3698.82 R14.2 2255.91,3795.27 R15.2
NetR14_3: R14.3 R15.1 U6.8 | length 247.5
  Top Routing w10: R15.1 2347.21,3831.46 2347.21,3738.63 2385.83,3700.01 R14.3 2413.39,3665.35 2413.39,3624.21 U6.8
NetR18_1: R18.1 U6.6 | length 158.5
  Top Routing w10: U6.6 2562.4,3518.31 R18.1
NetR18_2: R18.2 R19.2 R20.3 U5.5 | length 633.3
  Top Routing w10: R18.2 R18.2@2625.98,3515.75 ; R20.3 R18.2@2625.98,3515.75 ; U5.5 2842.32,3460.43 R19.2 2716.54,3515.75 R18.2@2625.98,3515.75
NetR21_1: R21.1 R22.2 U6.5 | length 193.2
  Top Routing w10: U6.5 2478.54,3468.31 R21.1 2482.28,3383.86 R22.2
NetR23_2: R23.2 RX1.2 | length 59.9
  Bottom Routing w10: RX1.2 2070.87,4252.04 2072.84,4250.07 R23.2
NetR24_2: R24.2 TX1.2 | length 59.9
  Bottom Routing w10: TX1.2 2068.9,4413.47 2070.87,4411.5 R24.2
NetRX1_1: RX1.1 U7.23 | length 189.5
  Bottom Routing w10: RX1.1 2044.35,4316 2090.29,4316 2112,4294.29 U7.23
NetTX1_1: TX1.1 U7.22 | length 501
  Power w10: v1(2195,4479) 2248.03,4425.97 v1(2248.03,4287.39)
  Bottom Routing w10: TX1.1 2043.96,4479 v1(2195,4479) ; U7.22 2224,4268.7 2242.69,4287.39 v1(2248.03,4287.39)
SCK: R4.2 U1.17 | length 1492.1
  Bottom Routing w10: U1.17 2866.14,3291.29 2971.43,3186 3280.12,3186 3632,3537.88 3632,3794.73 3597.2,3829.52 3597.2,3831.93 3483.03,3831.93 3483.03,3803.15 R4.2
USB_N: J1.2 U7.16 | length 558.3
  Bottom Routing w15: J1.2 1862.06,3874.01 1864.07,3872 1891.83,3872 1893.84,3874.01 1928.29,3874.01 2106.08,4051.81 2106.08,4057.78 2120.3,4071.99 2120.3,4099.67 2134.58,4113.96 2162.26,4113.96 2162.87,4114.57 2172.64,4114.57 U7.16
USB_P: J1.3 U7.15 | length 918.5
  Bottom Routing w15: J1.3 1629.92,3905.51 1609.47,3885.06 1609.47,3804.31 1630.1,3783.68 1873.31,3783.68 1953.29,3863.66 2168.83,4079.2 2168.83,4085.17 U7.15
WB1: P3.1 U2.3 U5.1 U5.2 | length 1368.1
  Top Routing w10: U5.1 U5.2 3148.04,3759.84 3319.3,3759.84 P3.1 v1(3385.83,4272)
  Bottom Routing w10: v1(3385.83,4272) 3475,4272 3513.19,4233.81 U2.3
WB1OUT: P3.3 U2.2 U5.6 U5.7 | length 1527.2
  Top Routing w10: U5.7 U5.6 2892.32,3544.69 2913.39,3523.62 3287.94,3523.62 3318.25,3493.31 P3.3 3439.31,3493.31 3463.19,3517.19 v1(3463.19,4124)
  Bottom Routing w10: v1(3463.19,4124) U2.2
pads on no net: J1.1 J1.4 J1.6 J1.7 J1.8 J1.9 J1.X J1.Y R5.1 R11.1 R13.1 R14.1 R20.1 R22.1 SW1.3 SW1.4 U1.1 U1.2 U1.9 U1.10 U1.11 U1.12 U1.13 U1.14 U1.19 U1.20 U1.22 U1.23 U1.24 U1.25 U1.26 U1.27 U1.28 U1.32 U2.1 U7.3 U7.6 U7.8 U7.9 U7.10 U7.11 U7.12 U7.13 U7.14 U7.19 U7.24 U7.26 U7.27 U7.28
copper on no net: | length 19.7
  Top Routing w10: 0,2850.39 0,2858.27
  Power w10: 3858.27,3047.24 3858.27,3059.06

## Polygon pours and split planes (outlines as drawn)
+5V on Power "Bottom Layer-No Net" (solid, pour order 18): 3830.71,4795.28 1377.95,4795.28 1377.95,3019.69 1362.2,3003.94 1409.45,3051.18 3842.52,3051.18
GND on GND Plane (split plane): 3759.43,3130.33 1461.04,3130.33 1461.04,4664.94 3759.43,4664.94

## Silkscreen, mask and mechanical layers (free items; w line width, h text height)
Top Overlay:
  lines w10: 3641.73,4527.56 3641.73,4527.56
  text "+12V" at 3527.56,4472.44 h30 r270
  text "-5V" at 3527.56,4275.59 h30 r270
  text "SG1" at 1748.03,4204.72 h30 r90
  text "GND" at 3527.56,4039.37 h30 r270
  text "SG2" at 1755.91,4003.94 h30 r90
  text "WB1" at 3527.56,3748.03 h30 r270
  text "GND" at 3523.62,3641.73 h30 r270
  text "SG3" at 1751.97,3566.93 h30 r90
  text "WB2" at 3527.56,3531.5 h30 r270
  text "GND" at 3527.56,3425.2 h30 r270
  text "SG4" at 1755.91,3389.76 h30 r90